# Altium PCB STM32F103VBT6-design.PcbDoc
Units mil, origin at the board's own origin, x right, y up, seen from the top; angles counter-clockwise.
Board outline 6000 x 4000 mil, 2 copper layers (Top Layer, Bottom Layer); 59 components, 109 nets, 368 pads, 60 vias.
Unrouted connection lines stored in the file: 1.
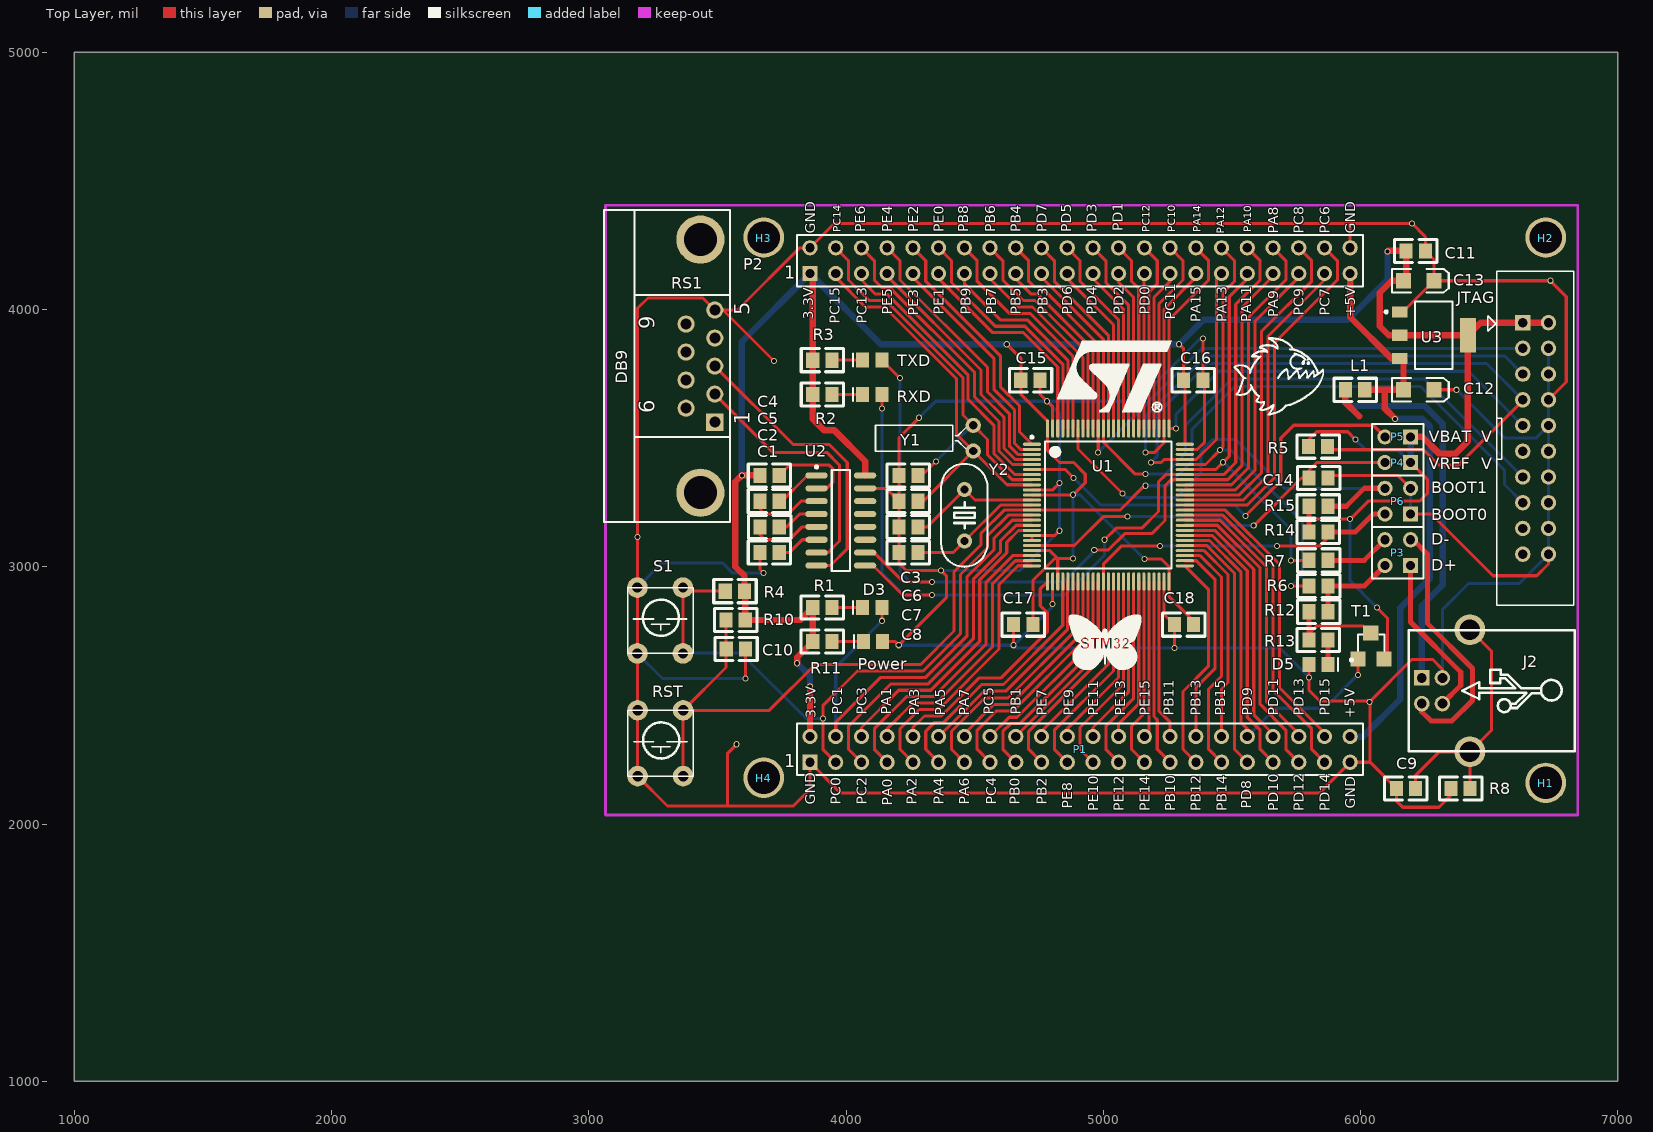
[diagram p0: Top Layer view]
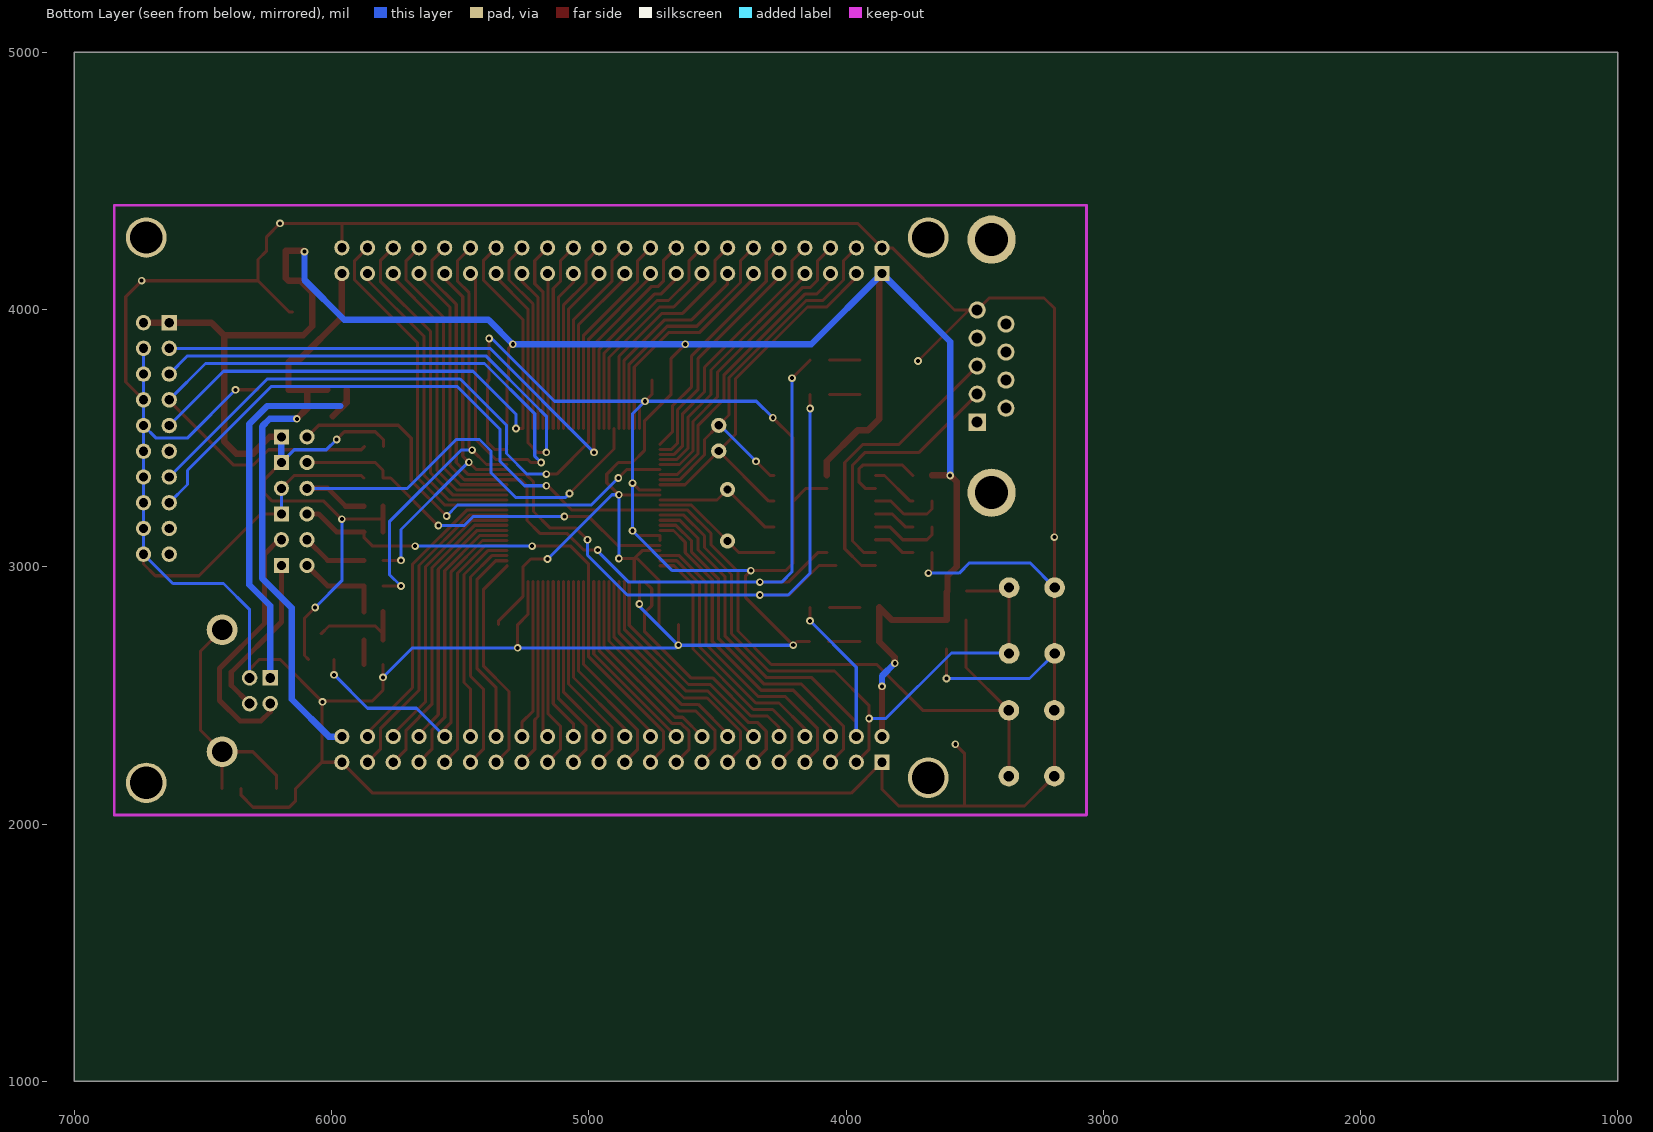
[diagram p1: Bottom Layer view, seen from below]

## Layer stack, top to bottom
Top Layer: signal copper 1.4
Dielectric: dielectric 12.6, FR-4, Dk 4.8
Bottom Layer: signal copper 1.4

## Board outline
1000,1000 7000,1000 7000,5000 1000,5000

## Design rules (kind name [scope] priority, off if disabled: settings)
Clearance [All] p1: gap=7
FabricationTestpoint [(IsPad And (OnTopLayer Or OnBottomLayer))] p1: side=3 testpointundercomponent=TRUE minsize=40 maxsize=100 preferedsize=60 minholesize=0 maxholesize=40 preferedholesize=32 testpointgrid=1 allowsidetop=TRUE allowsidebottom=TRUE usegrid=TRUE gridtolerance=0.01
PolygonConnect [All] p1: connectstyle=Relief reliefconductorwidth=10 reliefentries=4 polygonreliefangle="90 Angle"
RoutingVias [All] p1: holewidth=28 width=50 viastyle="Through Hole" minholewidth=28 minwidth=50 maxholewidth=28 maxwidth=50
SilkscreenOverComponentPads [All] p1: minsilkscreentomaskgap=10
SolderMaskExpansion [All] p1: expansion=4
Width [All] p1: maxlimit=100 minlimit=10 preferedwidth=10
26 further rules are at their usual default settings.

## Components (designator, comment, footprint, x,y, rotation, side; value= is the part's Value field where it differs from the comment)
C1 "Cap" 0805-S 3700,3060 r180 top
C2 "Cap" 0805-S 3706,3150 r0 top
C3 "Cap" 0805-S 4240,3360 r180 top
C4 "Cap" 0805-S 3700,3360 r180 top
C5 "Cap" 0805-S 3700,3260 r180 top
C6 "Cap" 0805-S 4240,3260 r180 top
C7 "Cap" 0805-S 4240,3160 r180 top
C8 "Cap" 0805-S 4240,3060 r180 top
C9 "Cap" 0805-S 6174,2143 r180 top
C10 "Cap" 0805-S 3575,2675 r0 top
C11 "Cap" 0805-S 6218,4223 r0 top
C12 "Cap Pol1" C_10UF 6226,3688 r180 top
C13 "Cap Pol1" C_10UF 6226,4112 r180 top
C14 "Cap" 0805-S 5840,3340 r0 top
C15 "Cap" 0805-S 4720,3720 r0 top
C16 "Cap" 0805-S 5353,3720 r0 top
C17 "Cap" 0805-S 4686,2780 r180 top
C18 "Cap" 0805-S 5311,2780 r180 top
D3 "LED1" C0805 4102,2842 r0 top
D5 "LED1" C0805 5837,2620 r180 top
H1 "Socket" Hold_2 6720,2160 r0 top
H2 "Socket" Hold_2 6720,4280 r0 top
H3 "Socket" Hold_2 3680,4280 r0 top
H4 "Socket" Hold_2 3680,2180 r0 top
J2 "4-1437106-7" USB_B_LOGO 6440,2520 r270 top
JTAG "JTAG(20-PIN)" IDE20-DIP 6680,3500 r0 top (schematic designator J1)
L1 "Res2" 0805-S 5982,3683 r0 top
P1 "Header 22X2" HDR2X22 3860,2240 r0 top locked
P2 "Header 22X2" HDR2X22 3860,4140 r0 top locked
P3 "Header 2X2" HDR2X2 6195,3005 r90 top
P4 "Header 2" HDR1X2 6195,3405 r180 top
P5 "Header 2" HDR1X2 6195,3505 r180 top
P6 "Header 2X2" HDR2X2 6195,3205 r90 top
Power "LED1" C0805 4105,2709 r0 top (schematic designator D4)
R1 "Res2" 0805-S 3905,2847 r180 top
R2 "Res2" 0805-S 3911,3665 r0 top
R3 "Res2" 0805-S 3911,3798 r0 top
R4 "Res2" 0805-S 3571,2900 r0 top
R5 "Res2" 0805-S 5838,3462 r0 top
R6 "Res2" 0805-S 5840,2920 r0 top
R7 "Res2" 0805-S 5840,3020 r0 top
R8 "Res2" 0805-S 6392,2133 r0 top
R10 "Res2" 0805-S 3574,2788 r0 top
R11 "Res2" 0805-S 3905,2714 r180 top
R12 "Res2" 0805-S 5840,2820 r0 top
R13 "Res2" 0805-S 5834,2720 r180 top
R14 "Res2" 0805-S 5834,3140 r180 top
R15 "Res2" 0805-S 5834,3240 r180 top
RS1 "RS232" DSUB1.385-2H9 3060,3780 r90 top
RST "SW-PB" key-press 3281,2323 r270 top
RXD "LED0" C0805 4102,3670 r0 top (schematic designator D2)
S1 "SW-PB" key-press 3280,2800 r270 top
T1 "8550" BEC-123 6046,2681 r90 top
TXD "LED0" C0805 4102,3804 r0 top (schematic designator D1)
U1 "STM32F103VBT6" LQFP100_N 5020,3240 r0 top locked
U2 "MAX3232" SOIC16 3980,3180 r0 top
U3 "REG1117-3.3" ZZ311 6285,3900 r270 top
Y1 "32.768K" 32768K 4300,3500 r270 top
Y2 "8M" XTAL_DIP 4460,3200 r270 top

## Footprints (in the part's own frame and the unit in brackets; to place one, negate y for a bottom-side part, rotate by r counter-clockwise, add the part's x,y. Pads: shape width x height; smd on the part's side, far side on the other; paste and mask are expansions set on the pad)
0805-S [mm] "0805-S"
  rect 1.3x1.5 smd: 1(-1.026,0.127) 2(0.874,0.127)
  silkscreen extent -2.16,-1.02 2.03,1.27
32768K [mm] "XTAL"
  round 1.5 hole 0.813: 1(-1.263,4.946) 2(1.277,4.946)
  silkscreen extent -1.26,-4.71 1.28,4.18
BEC-123 [mil]
  rect 59.06x59.06 smd: 1(-40,55) 2(-40,-45) 3(61,6)
  silkscreen extent -48,-47 55,86
C0805 [mm] "C0805"
  rect 1.3x1.5 smd: 1(-0.95,0) 2(0.95,0)
  silkscreen extent -1.9,-0.65 -1.9,0.65
C_10UF [mm] "C1206_10"
  rect 1.5x1.5 smd: 1(1.491,0) 2(-1.526,0)
  silkscreen extent -2.98,-1.15 2.64,1.15
DSUB1.385-2H9 [mm] "Connector; D Subminiature; 9 Position; Right Angle; Pitch 1.385 mm"
  rect 1.69x1.69 hole 1.09: 1(-5.54,-10.92)
  round 1.69 hole 1.09: 2(-2.77,-10.92) 3(0,-10.92) 4(2.77,-10.92) 5(5.54,-10.92) 6(-4.155,-8.08) 7(-1.385,-8.08) 8(1.385,-8.08) 9(4.155,-8.08)
  round 4.76 hole 3.26: 10(-12.495,-9.5) 11(12.495,-9.5)
  silkscreen extent -15.4,-12.4 15.4,0
HDR1X2 [mm] "Connector; Header; 2 Position"
  rect 1.5x1.5 hole 0.9: 1(0,0)
  round 1.5 hole 0.9: 2(2.54,0)
  silkscreen extent -1.27,-1.27 3.81,1.27
HDR2X2 [mm] "Connector; Header; 2x2 Position"
  rect 1.5x1.5 hole 0.9: 1(0,0)
  round 1.5 hole 0.9: 2(0,2.54) 3(2.54,0) 4(2.54,2.54)
  silkscreen extent -1.27,-1.27 3.81,3.81
HDR2X22 [mm] "Connector; Header; 22x2 Position"
  rect 1.5x1.5 hole 0.9: 1(0,0)
  round 1.5 hole 0.9: 2(0,2.54) 3(2.54,0) 4(2.54,2.54) 5(5.08,0) 6(5.08,2.54) 7(7.62,0) 8(7.62,2.54) 9(10.16,0) 10(10.16,2.54) 11(12.7,0) 12(12.7,2.54) 13(15.24,0) 14(15.24,2.54) 15(17.78,0) 16(17.78,2.54) 17(20.32,0) 18(20.32,2.54) 19(22.86,0) 20(22.86,2.54) 21(25.4,0) 22(25.4,2.54) 23(27.94,0) 24(27.94,2.54) 25(30.48,0) 26(30.48,2.54) 27(33.02,0) 28(33.02,2.54) 29(35.56,0) 30(35.56,2.54) 31(38.1,0) 32(38.1,2.54) 33(40.64,0) 34(40.64,2.54) 35(43.18,0) 36(43.18,2.54) 37(45.72,0) 38(45.72,2.54) 39(48.26,0) 40(48.26,2.54) 41(50.8,0) 42(50.8,2.54) 43(53.34,0) 44(53.34,2.54)
  silkscreen extent -1.27,-1.27 54.61,3.81
Hold_2 [mm] "Hold_2"
  round 1 hole 0.5: 1(-1.016,0) 1(0,-1.143) 1(0,1.016) 1(1.016,0)
  round 4 hole 3.2: 1(0,0)
IDE20-DIP [mil] "IDE20-DIP"
  rect 60x60 hole 36: 1(-49,449)
  round 60 hole 36: 2(51,449) 3(-49,349) 4(51,349) 5(-49,249) 6(51,249) 7(-49,149) 8(51,149) 9(-49,49) 10(51,49) 11(-49,-51) 12(51,-51) 13(-49,-151) 14(51,-151) 15(-49,-251) 16(51,-251) 17(-49,-351) 18(51,-351) 19(-49,-451) 20(51,-451)
  silkscreen extent -185,-650 150,649
key-press [mil] "KEY_DIP4"
  round 80 hole 40: 1(-119,86) 1(137,86) 2(-119,-91) 2(137,-91)
  silkscreen extent -119,-129 137,126
LQFP100_N [mm] "Thin QFP, 100-Leads, Body 14x14mm, Pitch 0.5mm, IPC Medium Density"
  oval 1.8x0.3 smd: 1(-7.55,6) 2(-7.55,5.5) 3(-7.55,5) 4(-7.55,4.5) 5(-7.55,4) 6(-7.55,3.5) 7(-7.55,3) 8(-7.55,2.5) 9(-7.55,2) 10(-7.55,1.5) 11(-7.55,1) 12(-7.55,0.5) 13(-7.55,0) 14(-7.55,-0.5) 15(-7.55,-1) 16(-7.55,-1.5) 17(-7.55,-2) 18(-7.55,-2.5) 19(-7.55,-3) 20(-7.55,-3.5) 21(-7.55,-4) 22(-7.55,-4.5) 23(-7.55,-5) 24(-7.55,-5.5) 25(-7.55,-6) 51(7.55,-6) 52(7.55,-5.5) 53(7.55,-5) 54(7.55,-4.5) 55(7.55,-4) 56(7.55,-3.5) 57(7.55,-3) 58(7.55,-2.5) 59(7.55,-2) 60(7.55,-1.5) 61(7.55,-1) 62(7.55,-0.5) 63(7.55,0) 64(7.55,0.5) 65(7.55,1) 66(7.55,1.5) 67(7.55,2) 68(7.55,2.5) 69(7.55,3) 70(7.55,3.5) 71(7.55,4) 72(7.55,4.5) 73(7.55,5) 74(7.55,5.5) 75(7.55,6)
  oval 0.3x1.8 smd: 26(-6,-7.55) 27(-5.5,-7.55) 28(-5,-7.55) 29(-4.5,-7.55) 30(-4,-7.55) 31(-3.5,-7.55) 32(-3,-7.55) 33(-2.5,-7.55) 34(-2,-7.55) 35(-1.5,-7.55) 36(-1,-7.55) 37(-0.5,-7.55) 38(0,-7.55) 39(0.5,-7.55) 40(1,-7.55) 41(1.5,-7.55) 42(2,-7.55) 43(2.5,-7.55) 44(3,-7.55) 45(3.5,-7.55) 46(4,-7.55) 47(4.5,-7.55) 48(5,-7.55) 49(5.5,-7.55) 50(6,-7.55) 76(6,7.55) 77(5.5,7.55) 78(5,7.55) 79(4.5,7.55) 80(4,7.55) 81(3.5,7.55) 82(3,7.55) 83(2.5,7.55) 84(2,7.55) 85(1.5,7.55) 86(1,7.55) 87(0.5,7.55) 88(0,7.55) 89(-0.5,7.55) 90(-1,7.55) 91(-1.5,7.55) 92(-2,7.55) 93(-2.5,7.55) 94(-3,7.55) 95(-3.5,7.55) 96(-4,7.55) 97(-4.5,7.55) 98(-5,7.55) 99(-5.5,7.55) 100(-6,7.55)
  silkscreen extent -7.67,-6.25 6.25,6.82, body extent -7,-7 7,7, height 1.6
SOIC16 [mm] "MAX3232_232"
  oval 2.2x0.6 smd: 1(-2.4,4.445) 2(-2.4,3.175) 3(-2.4,1.905) 4(-2.4,0.635) 5(-2.4,-0.635) 6(-2.4,-1.905) 7(-2.4,-3.175) 8(-2.4,-4.445) 9(2.4,-4.445) 10(2.4,-3.175) 11(2.4,-1.905) 12(2.4,-0.635) 13(2.4,0.635) 14(2.4,1.905) 15(2.4,3.175) 16(2.4,4.445)
  silkscreen extent -2.52,-5 0.9,5.42, body extent -2,-5 2,5, height 1.75
USB_B_LOGO [mil] "USB_Link"
  rect 60x60 hole 38: 1(-48,-201.5)
  round 60 hole 38: 2(52,-201.5) 3(52,-121.5) 4(-48,-121.5)
  round 120 hole 80: 5(-235,-14.5) 6(239,-14.5)
  silkscreen extent -233,-251 237,394
XTAL_DIP [mil]
  round 59.06 hole 32: 1(100,1) 2(-100,1)
  silkscreen extent -200,-90 200,90
ZZ311 [mm] "SOT-223/SC-73; 4 Leads; Body 6.7 x 7.3 mm, inc. leads (LxW max)"
  rect 1.1x1.55 smd: 1(-2.3,-3.375) 2(0,-3.375) 3(2.3,-3.375)
  rect 3.45x1.55 smd: 4(0,3.375)
  silkscreen extent -3.35,-4.82 3.35,1.85

## Part data
C1 C2 C3 C4 C5 C6 C7 C8 C9 C10 C11 C14 C15 C16 C17 C18: "Capacitor"
C12 C13: "Polarized Capacitor (Radial)"
D3 D5 Power: library part LED0, "Typical INFRARED GaAs LED"
J2: "USB 1.1, Right Angle, Thru-Hole, B Type, Receptacle, 4 Position, White"
JTAG: library part JTAG20
L1 R1 R2 R3 R4 R5 R6 R7 R8 R10 R11 R12 R13 R14 R15: "Resistor"
P1 P2: "Header, 22-Pin, Dual row"
P3 P6: "Header, 2-Pin, Dual row"
P4 P5: "Header, 2-Pin"
RS1: library part DB9
RXD TXD: "Typical INFRARED GaAs LED"
T1: library part PNP, "PNP Transistor"
U1: "STM32 ARM-based 32-bit MCU with 64 Kbytes Flash, 100-pin LQFP, Industrial Temperature"
U2: library part MAX232ACWE, "+5V Powered, Multi-Channel RS-232 Driver/Receiver"
U3: "800mA and 1A Low Dropout Positive Regulator 2.85V, 3.3V, 5V, and Adjustable"
Y1 Y2: library part CRYSTAL, "Crystal"

## Via types
v1: diameter 23.62/30 (per signal layer), hole 15.75, Top Layer to Bottom Layer, 60 vias

## Nets (pads, with @x,y where several pads share a name; then routed paths per layer and width w, separated by ;. In a path a pad name is that pad's centre, name@x,y a point inside that pad or via, vN(x,y) a via of type N, cw(c..) or ccw(c..) an arc to the next point about the centre after c; other vN are vias at no path point)
3.3V: C4.2 C11.1 C13.1 C15.1 C16.1 C17.1 C18.1 JTAG.1 JTAG.2 P1.2 P2.1 P4.1 P5.1 R1.2 R2.1 R3.1 R4.2 R5.1 R10.2 R11.2 R14.2 R15.2 T1.2 U1.11 U1.22 U1.28 U1.50 U1.75 U1.100 U2.16 U3.2 U3.4 | length 12488.5
  Top Layer w12: v1(4625,3865) 4679.6,3810.4 C15.1 4679.6,3670.4 4783.78,3566.22 U1.100 4783.78,3451.22 4830,3405 4885,3405 4930,3360 4930,3326.22 4883.15,3279.37 U1.11 ; U1.22 4792.17,3062.83 4823.15,3031.85 ; C17.1 4726.4,2946.4 4811.85,3031.85 4823.15,3031.85 ; U1.28 4823.15,3031.85 ; v1(4883.15,3031.85) 4823.15,3031.85 ; v1(5160,3030) 5225,3030 5256.22,2998.78 U1.50 5256.22,2883.78 5351.4,2788.6 C18.1 ; v1(5295,3865) 5312.6,3847.4 C16.1 ; U1.75 C16.1@5317.24,3722.65 ; R5.1 5797.6,3492.6 5830,3525 5950,3525 v1(5980,3495) ; 5799.6,3185 v1(5960,3185) 6030,3255 6230,3255 6260,3285 6260,3340 P4.1 ; v1(6063.47,2841.53) 6105,2800 6105,2655 T1.2@6090,2640
  Top Layer w20: R14.2 5799.6,3185 R15.2
  Top Layer w25: R4.2 3605.4,2964.6 3570,3000 3570,3330 v1(3595,3355) C4.2 ; R4.2@3608.4,2902 R10.2 3821.6,2793 R1.2 R11.2 3810,2648.4 v1(3810,2625) ; P1.2 v1(3860,2535) ; P2.1 3870.6,4129.4 R3.1 R2.1 3870.6,3574.4 3915,3530 3955,3530 4074.49,3410.51 U2.16 ; v1(6105,4225) 6108,4228 C11.1 6177.6,4122.31 C13.1 6122,4112 6075,4065 6075,3935 6110,3900 U3.2 U3.4 ; P5.1 6240,3505 6305,3440 6370,3440 6417.87,3487.87 U3.4 ; JTAG.2 JTAG.1 6466.87,3949 U3.4
  Bottom Layer w12: v1(4883.15,3031.85) v1(4883.15,3280) 4910,3280 v1(5160,3030) ; v1(5960,3185) 5960,2945 v1(6063.47,2841.53) ; v1(5980,3495) 6020,3455 6145,3455 P4.1
  Bottom Layer w25: v1(3595,3355) 3595,3875 P2.1 4135,3865 v1(4625,3865) v1(5295,3865) 5390,3960 5950,3960 6105,4115 v1(6105,4225) ; v1(3810,2625) 3860,2575 v1(3860,2535) ; P4.1 P5.1
5V: C12.1 L1.2 P1.44 P2.43 U3.3 | length 2346.9
  Top Layer w25: P2.43 5960,3970 6120.55,3809.45 U3.3 6167.29,3794.28 C12.1 6095,3688 ; L1.2 6095,3688 ; v1(6135,3575) 6095,3615 6095,3688
  Bottom Layer w25: P1.44 6010,2340 6155,2485 6155,2840 6270,2955 6270,3545 6240,3575 v1(6135,3575)
BOOT0: P6.4 R15.1 U1.94 | length 1821.4
  Top Layer w12: U1.94 4901.89,3458.11 v1(5075,3285)
  Top Layer w20: R15.1 5945,3235 6015,3305 P6.4
  Bottom Layer w12: v1(5075,3285) 5090,3270 5285,3270 5380,3365 5380,3450 5425,3495 5515,3495 5705,3305 P6.4
BOOT1: P1.19 P6.2 R14.1 U1.37 | length 2098.7
  Top Layer w12: P1.19 4710,2290 4710,2360 5000.31,2650.32 U1.37 5000.31,3010.32 5070,3080 v1(5220,3080) ; v1(5675,3080) 5840,3080 5874.4,3114.4 R14.1
  Top Layer w20: R14.1 5980,3135 6050,3205 P6.2
  Bottom Layer w12: v1(5220,3080) v1(5675,3080)
D+: P3.2 R6.2 R12.2 | length 353.7
  Top Layer w20: R12.2 R6.2 6015,2925 P3.2
D-: P3.4 R7.2 | length 253.7
  Top Layer w20: R7.2 6015,3025 P3.4
GND: C1.2 C3.2 C6.2 C7.2 C8.2 C9.2 C10.2 C11.2 C12.2 C13.2 C14.2 C15.2 C16.2 C17.2 C18.2 D5.2 J2.4 JTAG.4 JTAG.6 JTAG.8 JTAG.10 JTAG.12 JTAG.14 JTAG.16 JTAG.18 JTAG.20 P1.1 P1.43 P2.2 P2.44 P6.1 P6.3 Power.2 R8.1 RS1.5 RST.2 S1.2 U1.10 U1.19 U1.20 U1.27 U1.49 U1.74 U1.99 U2.15 U3.1 | length 22997.1
  Top Layer w12: v1(3575,2310) 3540,2275 3540,2070 ; v1(3609.4,2565.6) C10.2 ; C1.2 3665.6,2989.4 v1(3680,2975) ; v1(3720,3800) RS1.5@3521.89,3998.11 ; U2.15 4155.6,3305 C6.2 ; Power.2 4191,2709 v1(4205,2695) 4390,2880 4390,2965 v1(4370,2985) 4235,2985 4205.6,3014.4 C8.2 C7.2 C6.2 ; v1@4285,3580 v1(4284.29,3579.29) 4205.6,3500.6 C3.2 C6.2 ; v1(4651.6,2695) C17.2 ; U1.20 4722.76,3121.8 4811.8,3121.8 v1(4830,3140) ; U1.10 4804.06,3299.06 v1(4830,3325) ; C15.2 4754.4,3670.6 v1(4781.59,3643.41) 4803.46,3621.54 U1.99 ; v1(4803.46,2855) U1.27 ; U1.49 5236.54,2815.06 C18.2 v1(5276.6,2685) ; U1.74 5366.54,3456.54 5394.4,3484.4 C16.2@5394.4,3725 ; C16.2 v1(5387.4,3887.6) ; D5.2 5799.6,2615.4 5799.6,2520.4 5842.4,2477.6 v1@6037.6,2477.6 ; C14.2 5884.4,3355 6145,3355 P6.3 ; P2.44 5960,4335 ; 6037.6,2377.4 6037.6,2240 ; 6037.6,2382 v1@6037.6,2477.6 ; U3.1 6164.64,3990.55 C13.2 ; P6.1 6275,3205 6515,2965 6685,2965 6731,3011 JTAG.20 ; C12.2 v1(6373,3688) ; J2.4 6318.5,2601.5 6280,2640 6200,2640 v1@6037.6,2477.6 ; R8.1 6351.6,2111.6 6305,2065 6165,2065 6139.6,2090.4 C9.2 6037.6,2240 ; JTAG.8 6800,3718 6800,4050 v1(6738,4112) C13.2 ; RS1.5@3521.89,3998.11 RS1.5 3443.03,4045 3230,4045 3189,4004 3189,2919 3189,2663 3189,2187 3190,2186 3306,2070 3540,2070 ; RS1.5@3521.89,3998.11 3578.11,3998.11 3820,4240 P2.2 3955,4335 5960,4335 ; 3540,2070 3795,2070 3860,2135 P1.1 3980,2120 5840,2120 P1.43 6037.6,2240 ; 5960,4335 v1(6200,4335) 6252.4,4282.6 C11.2 6286.09,4194.32 C13.2
  Bottom Layer w12: S1.2@3189,2663 3286.4,2565.6 v1(3609.4,2565.6) ; S1.2@3189,2919 3285,3015 3520,3015 3560,2975 v1(3680,2975) ; v1(4205,2695) v1(4651.6,2695) ; v1@4285,3580 4348.41,3643.41 v1(4781.59,3643.41) ; v1(4370,2985) 4675,2985 v1(4830,3140) v1(4830,3325) 4830,3595 v1(4781.59,3643.41) ; v1(4803.46,2855) 4803.46,2846.87 v1(4651.6,2695) ; v1(5387.4,3887.6) 5377.6,3887.6 5133.41,3643.41 v1(4781.59,3643.41) ; v1(5800,2570) 5685,2685 v1(5276.6,2685) 4661.6,2685 v1(4651.6,2695) ; P6.1 P6.3 ; J2.4 6318.5,2820 ; 6318.5,2828.5 6318.5,2820 ; v1(6373,3688) 6561,3500 6682,3500 JTAG.10 ; JTAG.4 JTAG.6 JTAG.8 JTAG.10 ; 6318.5,2820 6318.5,2833.5 6420,2935 6617,2935 JTAG.20 JTAG.18 JTAG.16 JTAG.14 JTAG.12 JTAG.10
  other v1: 6035,2475 3190,3115
NetC1_1: C1.1 U2.6 | length 165.8
  Top Layer w12: C1.1 3780,3055 3830,3105 U2.6
NetC2_1: C2.1 U2.5 | length 279.3
  Top Layer w12: C2.1 3665.6,3124.4 3685,3105 3780,3105 3830,3155 U2.5
NetC2_2: C2.2 U2.4 | length 165.8
  Top Layer w12: C2.2 3770,3155 3820,3205 U2.4
NetC4_1: C4.1 U2.2 | length 357.2
  Top Layer w12: C4.1 3780.4,3395 3935,3395 3950,3380 3950,3330 3925,3305 U2.2
NetC5_1: C5.1 U2.1 | length 186.5
  Top Layer w12: C5.1 3750,3255 3850,3355 U2.1
NetC5_2: C5.2 U2.3 | length 279.3
  Top Layer w12: C5.2 3665.6,3224.4 3685,3205 3775,3205 3825,3255 U2.3
NetC9_1: C9.1 J2.5 J2.6 R8.2 | length 988.3
  Top Layer w12: C9.1 6214.4,2189.4 6306,2281 J2.6 J2.6@6426.4,2281.9 ; J2.5 6510,2670.5 6510,2365.5 6429.75,2285.25 J2.6@6426.4,2281.9 ; R8.2 J2.6@6426.4,2281.9
NetC14_1: C14.1 P4.2 U1.21 | length 1552.2
  Top Layer w12: U1.21 4887.52,3082.52 5000,3195 v1(5095,3195) ; v1(5585,3160) 5770,3345 C14.1 5799.6,3374.6 5830,3405 P4.2
  Bottom Layer w12: v1(5095,3195) 5125,3195 5450,3195 5485,3160 v1(5585,3160)
NetD1_1: R3.2 TXD.1 | length 119.6
  Top Layer w12: R3.2 3946.4,3804 TXD.1
NetD2_1: R2.2 RXD.1 | length 119.2
  Top Layer w12: R2.2 RXD.1
NetD3_1: D3.1 R1.1 | length 119.2
  Top Layer w12: R1.1 D3.1
NetD4_1: Power.1 R11.1 | length 122.2
  Top Layer w12: R11.1 Power.1
NetD5_1: D5.1 R13.1 | length 95
  Top Layer w20: D5.1 R13.1
NetJ2_1: J2.1 L1.1 | length 1529.9
  Top Layer w25: L1.1 5941.6,3638.41 5995.01,3585
  Bottom Layer w25: 5965,3625 6250,3625 6320,3555 6320,2930 6238.5,2848.5 J2.1
NetJ2_2: J2.2 P3.3 | length 1006.5
  Top Layer w20: P3.3 6205,3105 6260,3050 6260,2780 6435,2605 6435,2480 6355,2400 6275,2400 6238.5,2436.5 J2.2
NetJ2_3: J2.3 P3.1 | length 647.4
  Top Layer w20: P3.1 6195,2785 6390,2590 6390,2539.5 J2.3
NetR12_1: R12.1 R13.2 T1.3 | length 400
  Top Layer w12: R13.2 5799.6,2739.6 5830,2770 6010,2770 T1.3@6040,2740
  Top Layer w20: R13.2 R12.1
NetRS1_2: RS1.2 U2.7 | length 1002.5
  Top Layer w12: RS1.2 3715.87,3445 3925,3445 3975,3395 3975,3100 3930,3055 U2.7
NetRS1_3: RS1.3 U2.8 | length 1151.8
  Top Layer w12: RS1.3 3794.92,3475 3935,3475 4005,3405 4005,3070 3940,3005 U2.8
OSC_IN: C7.1 U1.12 Y2.2 | length 519.1
  Top Layer w12: C7.1 4316,3155 Y2.2 4501.31,3259.68 U1.12
OSC_OUT: C8.1 U1.13 Y2.1 | length 519
  Top Layer w12: C8.1 4416,3055 Y2.1 4601,3240 U1.13
PA0: P1.7 U1.23 | length 1182.9
  Top Layer w12: P1.7 4110,2290 4110,2370 4235,2495 4340,2495 4545,2700 4545,2940 4648.15,3043.15 U1.23
PA1: P1.8 U1.24 | length 1006.9
  Top Layer w12: P1.8 4160,2370 4260.25,2470.25 4350.25,2470.25 4570,2690 4570,2935 4658.46,3023.46 U1.24
PA2: P1.9 U1.25 | length 1072.4
  Top Layer w12: P1.9 4210,2290 4210,2370 4285,2445 4360,2445 4595,2680 4595,2930 4668.78,3003.78 U1.25
PA3: P1.10 U1.26 | length 931.4
  Top Layer w12: P1.10 4260,2375 4305,2420 4370,2420 4518.28,2568.28 4603.28,2568.28 4783.78,2748.78 4783.78,2820 4755,2848.78 4755,2913.98 U1.26
PA4: P1.11 U1.29 | length 1014.3
  Top Layer w12: P1.11 4310,2290 4310,2360 4345,2395 4380,2395 4527.56,2542.56 4612.56,2542.56 4842.74,2772.74 U1.29@4842.74,2942.66
PA5: P1.12 U1.30 | length 860.7
  Top Layer w12: P1.12 4536.23,2516.24 4621.23,2516.24 4861.74,2756.74 4861.74,2880 4861.74,2941.98 U1.30
PA6: P1.13 U1.31 | length 971.6
  Top Layer w12: P1.13 4410,2290 4410,2360 4540,2490 4630,2490 4882.11,2742.11 U1.31@4882.11,2942.66
PA7: P1.14 U1.32 | length 823.9
  Top Layer w12: P1.14 4460,2350 4575,2465 4640,2465 4901.11,2726.11 4901.11,2941.98 U1.32
PA8: P2.38 U1.67 | length 1211
  Top Layer w12: U1.67 5498.74,3318.74 5565,3385 5565,3970 5710,4115 5710,4190 P2.38
PA9: P2.37 TXD.2 U1.68 U2.10 | length 3573.1
  Top Layer w12: U2.10 4110,3055 4225,2940 v1(4335,2940) ; TXD.2 v1(4210,3733.4) ; v1(4965,3065) 5020,3065 5085,3130 5190,3130 5240,3180 5240,3315 5263.43,3338.43 U1.68 5483.43,3338.43 5540,3395 5540,4010 5660,4130 P2.37
  Bottom Layer w12: v1(4210,3733.4) 4210,2980 4250,2940 v1(4335,2940) 4845,2940 4965,3060 v1(4965,3065)
PA10: P2.36 RXD.2 U1.69 U2.9 | length 3659
  Top Layer w12: U2.9@4040,3005 U2.9 4105,3005 4220,2890 v1(4335,2890) ; v1(4139.4,3615.6) RXD.2 ; v1(5005,3105) 5050,3150 5150,3150 5215,3215 5215,3330 5243.11,3358.11 U1.69 5468.11,3358.11 5515,3405 5515,4020 5610,4115 5610,4190 P2.36
  Bottom Layer w12: v1(4139.4,3615.6) 4139.4,2975.6 4225,2890 v1(4335,2890) 4850,2890 5005,3045 v1(5005,3105)
PA11: P2.35 R7.1 U1.70 | length 1494.9
  Top Layer w12: U1.70 5437.8,3377.8 v1(5466.27,3406.27) 5490,3430 5490,4050 5560,4120 P2.35 ; v1(5730,3025) R7.1
  Bottom Layer w12: v1(5466.27,3406.27) 5468.73,3406.27 5730,3145 v1(5730,3025)
PA12: P2.34 R6.1 U1.71 | length 1765.2
  Top Layer w12: U1.71 5397.48,3397.48 v1(5453.47,3453.47) 5465,3465 5465,4065 5510,4110 5510,4190 P2.34 ; v1(5730,2925) R6.1
  Bottom Layer w12: v1(5453.47,3453.47) 5496.53,3453.47 5775,3175 5775,2970 v1(5730,2925)
PA13: JTAG.7 P2.33 R5.2 U1.72 | length 3606.5
  Top Layer w12: v1(5185,3405) 5225,3405 5237.17,3417.17 U1.72 5362.17,3417.17 5440,3495 5440,4120 P2.33 ; R5.2 5884.4,3455 6245,3455 6305,3395 6380,3395 6631,3646 JTAG.7
  Bottom Layer w12: v1@5185,3410 v1(5185,3405) 5210,3430 5210,3595 5405,3790 6490,3790 JTAG.7
PA14: JTAG.9 P2.32 U1.76 | length 2374.1
  Top Layer w12: v1(5282.76,3537.24) U1.76 5256.22,3961.22 5410,4115 5410,4190 P2.32
  Bottom Layer w12: v1(5282.76,3537.24) 5282.76,3592.76 5450,3760 6420,3760 JTAG.9
PA15: JTAG.5 P2.31 U1.77 | length 2529
  Top Layer w12: v1(5165,3445) 5200,3445 5236.54,3481.54 U1.77 5236.54,4001.54 5360,4125 P2.31
  Bottom Layer w12: v1(5165,3445) 5165,3585 5215,3635 5400,3820 6560,3820 JTAG.5
PB0: P1.17 U1.35 | length 889.3
  Top Layer w12: P1.17 4610,2290 4610,2360 4640,2390 4675,2390 4960.94,2675.94 4960.94,2760 U1.35
PB1: P1.18 U1.36 | length 735.6
  Top Layer w12: P1.18 4980.63,2660.63 U1.36
PB3: JTAG.13 P2.19 U1.89 | length 2812.7
  Top Layer w12: P2.19 4760,4125 5000.31,3884.68 U1.89 5001,3536.56 5001,3484 5125,3360 v1(5165,3360)
  Bottom Layer w12: v1(5165,3360) 5240,3360 5320,3440 5320,3550 5500,3730 6250,3730 JTAG.13
PB4: JTAG.3 P2.18 U1.90 | length 2760.2
  Top Layer w12: P2.18 4710,4190 4710,4110 4730,4090 4755,4090 4980.63,3864.37 U1.90 v1@4980.63,3445.63
  Bottom Layer w12: v1(4980,3445) 5384,3849 JTAG.3
PB5: P2.17 U1.91 | length 742.1
  Top Layer w12: P2.17 4660,4120 4720,4060 4745,4060 4960.94,3844.06 U1.91
PB6: P2.16 U1.92 | length 887
  Top Layer w12: P2.16 4610,4190 4610,4115 4690,4035 4735,4035 4941.26,3828.74 U1.92
PB7: P2.15 U1.93 | length 784.7
  Top Layer w12: P2.15 4560,4120 4670,4010 4725,4010 4921.57,3813.43 U1.93
PB8: P2.14 U1.95 | length 924.5
  Top Layer w12: P2.14 4510,4190 4510,4110 4635,3985 4715,3985 4882.2,3817.8 U1.95
PB9: P2.13 U1.96 | length 831
  Top Layer w12: P2.13 4460,4100 4600,3960 4705,3960 4862.52,3802.48 U1.96
PB10: P1.29 U1.47 | length 728.8
  Top Layer w12: U1.47 5197.17,2417.83 5210,2405 5210,2290 P1.29
PB11: P1.30 U1.48 | length 620.6
  Top Layer w12: U1.48 5216.85,2438.15 5260,2395 P1.30
PB12: P1.31 U1.51 | length 864.3
  Top Layer w12: U1.51 5410,2911.02 5410,2615 5310,2515 5310,2290 P1.31
PB13: P1.32 U1.52 | length 789.3
  Top Layer w12: U1.52 5361.54,3023.46 5435,2950 5435,2605 5360,2530 P1.32
PB14: P1.33 U1.53 | length 938.6
  Top Layer w12: U1.53 5376.85,3043.15 5460,2960 5460,2575 5410,2525 5410,2290 P1.33
PB15: P1.34 U1.54 | length 846.6
  Top Layer w12: U1.54 5392.17,3062.83 5485,2970 5485,2550 5460,2525 P1.34
PC0: P1.3 R4.1 S1.1 U1.15 | length 2598.2
  Top Layer w12: S1.1@3366,2663 3366,2919 3380,2905 R4.1 ; P1.3 3910,2290 3910,2460 4045,2595 4300,2595 4445,2740 4445,2970 4550,3075 4550,3120 4630.63,3200.63 U1.15
  Bottom Layer w12: S1.1@3366,2663 3368,2665 3590,2665 3845,2410 v1(3910,2410)
PC1: D3.2 P1.4 U1.16 | length 1881
  Top Layer w12: P1.4 3960,2395 4135,2570 4310,2570 4470,2730 4470,2960 4575,3065 4575,3110 4645.94,3180.94 U1.16 ; v1@4139.4,2789.93 D3.2
  Bottom Layer w12: P1.4 3960,2610 v1(4140,2790)
PC2: P1.5 U1.17 | length 1358.2
  Top Layer w12: P1.5 4010,2290 4010,2380 4175,2545 4320,2545 4495,2720 4495,2951.87 4600,3056.87 4600,3100 4661.26,3161.26 U1.17
PC3: P1.6 U1.18 | length 1179.3
  Top Layer w12: P1.6 4060,2375 4205,2520 4330,2520 4520,2710 4520,2950 4625,3055 4625,3095 4670.8,3140.8 4721.98,3140.8 U1.18
PC4: P1.15 U1.33 | length 932
  Top Layer w12: P1.15 4510,2290 4510,2365 4585,2440 4650,2440 4921.57,2711.57 4921.57,2790 U1.33
PC5: P1.16 U1.34 | length 778.3
  Top Layer w12: P1.16 4635,2415 4665,2415 4941.26,2691.26 4941.26,2770 U1.34
PC6: P2.42 U1.63 | length 1408.4
  Top Layer w12: U1.63 5560,3240 5665,3345 5665,3870 5910,4115 5910,4190 P2.42
PC7: P2.41 U1.64 | length 1238.4
  Top Layer w12: U1.64 5544.69,3259.68 5640,3355 5640,3895 5860,4115 P2.41
PC8: P2.40 U1.65 | length 1309.7
  Top Layer w12: U1.65 5529.37,3279.37 5615,3365 5615,3915 5810,4110 5810,4190 P2.40
PC9: P2.39 U1.66 | length 1139.6
  Top Layer w12: U1.66 5514.06,3299.06 5590,3375 5590,3955 5760,4125 P2.39
PC10: P2.30 U1.78 | length 762.1
  Top Layer w12: U1.78 5216.85,4021.85 5310,4115 5310,4190 P2.30
PC11: P2.29 U1.79 | length 628.8
  Top Layer w12: U1.79 5197.17,4047.17 5260,4110 P2.29
PC12: P2.28 U1.80 | length 736.9
  Top Layer w12: P2.28 5210,4190 5210,4100 5177.48,4067.48 U1.80
PC13: P2.5 U1.7 | length 1121.4
  Top Layer w12: P2.5 4060,4115 4115,4060 4160,4060 4475,3745 4475,3650 4575,3550 4575,3440 4656.89,3358.11 U1.7
PC14: C3.1 P2.4 U1.8 Y1.1 | length 1598.5
  Top Layer w12: P2.4 4010,4190 4010,4115 4090,4035 4155,4035 4454.72,3735.28 4454.72,3589.72 Y1.1 4494.72,3544.72 4500.28,3544.72 4550,3495 4550,3435 4646.57,3338.43 U1.8 ; C3.1 4295,3355 v1(4350,3410)
  Bottom Layer w12: v1(4350,3410) 4489.72,3549.72 Y1.1
PC15: C6.1 P2.3 U1.9 Y1.2 | length 1533
  Top Layer w12: P2.3 3960,4125 4075,4010 4150,4010 4430,3730 4430,3514.44 Y1.2 ; C6.1 4300,3255 Y1.2 ; U1.9 4625.7,3318.74 Y1.2
PD0: P2.27 U1.81 | length 603.7
  Top Layer w12: U1.81 5157.8,4137.8 P2.27
PD1: P2.26 U1.82 | length 735.1
  Top Layer w12: P2.26 5110,4190 5110,4110 5138.11,4081.89 U1.82
PD2: P2.25 U1.83 | length 627
  Top Layer w12: P2.25 5060,4105 5118.43,4046.57 U1.83
PD3: P2.24 U1.84 | length 760.2
  Top Layer w12: P2.24 5010,4190 5010,4105 5098.74,4016.26 U1.84
PD4: P2.23 U1.85 | length 652.1
  Top Layer w12: P2.23 4960,4120 5079.06,4000.94 U1.85
PD5: P2.22 U1.86 | length 785.3
  Top Layer w12: P2.22 4910,4190 4910,4110 5059.37,3960.63 U1.86
PD6: P2.21 U1.87 | length 677.2
  Top Layer w12: P2.21 4860,4120 5039.69,3940.32 U1.87
PD7: P2.20 U1.88 | length 810.5
  Top Layer w12: P2.20 4810,4190 4810,4110 5020,3900 U1.88
PD8: P1.35 U1.55 | length 993
  Top Layer w12: U1.55 5402.48,3082.52 5510,2975 5510,2290 P1.35
PD9: P1.36 T1.1 U1.56 | length 1508.1
  Top Layer w12: U1.56 5412.8,3102.2 5535,2980 5535,2395 5560,2370 P1.36 ; v1(5990,2580) T1.1@5990,2640
  Bottom Layer w12: P1.36 5670,2450 5860,2450 v1(5990,2580)
PD10: P1.37 U1.57 | length 1085.9
  Top Layer w12: U1.57 5423.11,3121.89 5560,2985 5560,2415 5610,2365 5610,2290 P1.37
PD11: P1.38 U1.58 | length 1011.6
  Top Layer w12: U1.58 5433.43,3141.57 5585,2990 5585,2425 5660,2350 P1.38
PD12: P1.39 U1.59 | length 1178.8
  Top Layer w12: U1.59 5443.74,3161.26 5610,2995 5610,2465 5710,2365 5710,2290 P1.39
PD13: P1.40 U1.60 | length 1104.5
  Top Layer w12: U1.60 5454.06,3180.94 5635,3000 5635,2475 5760,2350 P1.40
PD14: P1.41 U1.61 | length 1271.6
  Top Layer w12: U1.61 5464.37,3200.63 5660,3005 5660,2520 5810,2370 5810,2290 P1.41
PD15: P1.42 U1.62 | length 1197.4
  Top Layer w12: U1.62 5474.69,3220.32 5685,3010 5685,2530 5860,2355 P1.42
PE0: P2.12 U1.97 | length 970.1
  Top Layer w12: P2.12 4410,4190 4410,4105 4580,3935 4695,3935 4842.83,3787.17 U1.97
PE1: P2.11 U1.98 | length 864.9
  Top Layer w12: P2.11 4360,4120 4570,3910 4690,3910 4823.15,3776.85 U1.98
PE2: P2.10 U1.1 | length 955.5
  Top Layer w12: P2.10 4310,4190 4310,4110 4600,3820 4600,3700 4675,3625 4675,3523.98 U1.1
PE3: P2.9 U1.2 | length 901.1
  Top Layer w12: P2.9 4260,4125 4575,3810 4575,3690 4655,3610 4655,3480 4678.46,3456.54 U1.2
PE4: P2.8 U1.3 | length 1068.2
  Top Layer w12: P2.8 4210,4190 4210,4115 4550,3775 4550,3680 4635,3595 4635,3470 4668.15,3436.85 U1.3
PE5: P2.7 U1.4 | length 994
  Top Layer w12: P2.7 4160,4130 4525,3765 4525,3670 4615,3580 4615,3460 4657.83,3417.17 U1.4
PE6: P2.6 U1.5 | length 1178.7
  Top Layer w12: P2.6 4110,4190 4110,4115 4140,4085 4170,4085 4500,3755 4500,3710 4500,3660 4595,3565 4595,3450 4647.52,3397.48 U1.5
PE7: P1.20 U1.38 | length 710.5
  Top Layer w12: P1.20 4760,2360 5020,2620 U1.38
PE8: P1.21 U1.39 | length 818.6
  Top Layer w12: P1.21 4810,2290 4810,2365 5039.69,2594.68 U1.39
PE9: P1.22 U1.40 | length 685.3
  Top Layer w12: P1.22 4860,2370 5059.37,2569.37 U1.40
PE10: P1.23 U1.41 | length 793.5
  Top Layer w12: P1.23 4910,2290 4910,2375 5079.06,2544.06 U1.41
PE11: P1.24 U1.42 | length 660.2
  Top Layer w12: P1.24 4960,2375 5098.74,2513.74 U1.42
PE12: P1.25 U1.43 | length 768.4
  Top Layer w12: P1.25 5010,2290 5010,2380 5118.43,2488.43 U1.43
PE13: P1.26 U1.44 | length 635.1
  Top Layer w12: P1.26 5060,2390 5138.11,2468.11 U1.44
PE14: P1.27 U1.45 | length 743.3
  Top Layer w12: U1.45 5157.8,2427.8 5110,2380 5110,2290 P1.27
PE15: P1.28 U1.46 | length 610
  Top Layer w12: P1.28 5177.48,2357.48 U1.46
RST: C10.1 JTAG.15 R10.1 RST.1 U1.14 | length 4914.4
  Top Layer w12: RST.1@3367,2186 RST.1@3367,2442 ; R10.1 3533.6,2608.6 RST.1@3367,2442 ; v1(5165,3315) 5160,3315 5065.31,3220.32 U1.14 4615.31,3220.32 4525,3130 4525,3085 4420,2980 4420,2750 4290,2620 3880,2620 3702,2442 RST.1@3367,2442
  Bottom Layer w12: v1(5165,3315) 5250,3315 5345,3410 5345,3535 5510,3700 6235,3700 6560,3375 6560,3320 JTAG.15
VBAT: P5.2 U1.6 | length 1708.2
  Top Layer w12: U1.6 4852.2,3377.8 v1(4885,3345) ; v1(5552.5,3197.5) 5690,3335 5690,3500 5740,3550 6050,3550 P5.2
  Bottom Layer w12: v1(4885,3345) 4990,3240 5045,3240 5510,3240 v1(5552.5,3197.5)
pads on no net: H1.1 H2.1 H3.1 H4.1 JTAG.11 JTAG.17 JTAG.19 RS1.1 RS1.4 RS1.6 RS1.7 RS1.8 RS1.9 RS1.10 RS1.11 U1.73 U2.11 U2.12 U2.13 U2.14

## Keep-outs
Keep-Out Layer:
  lines w10: 3065,2035 6845,2035 6845,4405 3065,4405 3065,2035

## Silkscreen, mask and mechanical layers (free items; w line width, h text height)
Top Overlay:
  drawing of 2627 lines, arcs and shapes, not listed
  text "PD1" at 5075,4305 h40 r90
  text "PC14" at 3980,4300 h30 r90
  text "PE6" at 4075,4300 h40 r90
  text "PE4" at 4180,4300 h40 r90
  text "PE2" at 4280,4300 h40 r90
  text "PE0" at 4380,4300 h40 r90
  text "PB8" at 4475,4300 h40 r90
  text "PB6" at 4580,4300 h40 r90
  text "PB4" at 4680,4300 h40 r90
  text "PD7" at 4780,4300 h40 r90
  text "PD5" at 4875,4300 h40 r90
  text "PD3" at 4975,4300 h40 r90
  text "PC12" at 5180,4300 h30 r90
  text "PC10" at 5280,4300 h30 r90
  text "PA14" at 5380,4300 h30 r90
  text "PA10" at 5575,4300 h30 r90
  text "GND" at 3880,4295 h40 r90
  text "PA12" at 5470,4295 h30 r90
  text "PA8" at 5680,4295 h40 r90
  text "PC8" at 5780,4295 h40 r90
  text "PC6" at 5880,4295 h40 r90
  text "GND" at 5980,4295 h40 r90
  text "PE5" at 4180,3980 h40 r90
  text "PE1" at 4380,3980 h40 r90
  text "PB9" at 4485,3980 h40 r90
  text "PB7" at 4585,3980 h40 r90
  text "PB5" at 4680,3980 h40 r90
  text "PB3" at 4785,3980 h40 r90
  text "PD6" at 4880,3980 h40 r90
  text "PD4" at 4975,3980 h40 r90
  text "PD2" at 5080,3980 h40 r90
  text "PD0" at 5180,3980 h40 r90
  text "PE3" at 4280,3975 h40 r90
  text "PC9" at 5780,3975 h40 r90
  text "PC7" at 5880,3975 h40 r90
  text "PA9" at 5680,3970 h40 r90
  text "+5V" at 5980,3970 h40 r90
  text "3.3V" at 3873,3961 h40 r90
  text "PC11" at 5280,3960 h40 r90
  text "PA15" at 5380,3950 h40 r90
  text "PA13" at 5480,3950 h40 r90
  text "PA11" at 5575,3950 h40 r90
  text "PC15" at 3975,3945 h40 r90
  text "PC13" at 4080,3945 h40 r90
  text "DB9" at 3150,3711 h45 r90
  text "VBAT" at 6265,3485 h45
  text "V" at 6470,3485 h45
  text "VREF" at 6265,3380 h45
  text "V" at 6470,3380 h45
  text "BOOT1" at 6275,3285 h45
  text "BOOT0" at 6275,3180 h45
  text "D-" at 6275,3085 h45
  text "D+" at 6275,2985 h45
  text "PC1" at 3985,2425 h40 r90
  text "PC3" at 4080,2425 h40 r90
  text "PA1" at 4175,2425 h40 r90
  text "PC5" at 4575,2425 h40 r90
  text "PB1" at 4680,2425 h40 r90
  text "PA3" at 4285,2420 h40 r90
  text "PA5" at 4385,2420 h40 r90
  text "PA7" at 4480,2420 h40 r90
  text "PE7" at 4780,2420 h40 r90
  text "PE9" at 4885,2420 h40 r90
  text "PE11" at 4980,2420 h40 r90
  text "PE13" at 5085,2420 h40 r90
  text "PE15" at 5180,2420 h40 r90
  text "PB11" at 5275,2420 h40 r90
  text "PB13" at 5380,2420 h40 r90
  text "PB15" at 5475,2420 h40 r90
  text "PD9" at 5580,2420 h40 r90
  text "PD11" at 5680,2420 h40 r90
  text "PD13" at 5780,2420 h40 r90
  text "PD15" at 5880,2420 h40 r90
  text "3.3V" at 3883,2411 h40 r90
  text "+5V" at 5978,2411 h40 r90
  text "GND" at 3880,2075 h40 r90
  text "PC0" at 3980,2075 h40 r90
  text "PC2" at 4080,2075 h40 r90
  text "PA2" at 4275,2075 h40 r90
  text "PA4" at 4380,2075 h40 r90
  text "PA6" at 4480,2075 h40 r90
  text "PC4" at 4585,2075 h40 r90
  text "PB0" at 4675,2075 h40 r90
  text "PB2" at 4780,2075 h40 r90
  text "PA0" at 4180,2070 h40 r90
  text "PE8" at 4880,2060 h40 r90
  text "PD8" at 5575,2060 h40 r90
  text "GND" at 5980,2060 h40 r90
  text "PE10" at 4980,2050 h40 r90
  text "PE12" at 5080,2050 h40 r90
  text "PE14" at 5180,2050 h40 r90
  text "PB10" at 5280,2050 h40 r90
  text "PB12" at 5380,2050 h40 r90
  text "PB14" at 5480,2050 h40 r90
  text "PD10" at 5680,2050 h40 r90
  text "PD12" at 5780,2050 h40 r90
  text "PD14" at 5880,2050 h40 r90

## Text inside footprints (layer, text, board x,y; h text height)
P1: Top Overlay "1" at 3760,2220 h50
P2: Top Overlay "1" at 3760,4120 h50
RS1: Top Overlay "6" at 3255.87,3596.73 h59.06 r90; Top Overlay "9" at 3255.87,3923.9 h59.06 r90; Top Overlay "5" at 3625.94,3978.43 h59.06 r90; Top Overlay "1" at 3625.94,3552.05 h59.06 r90